# Altium PCB Arm_controller.PcbDoc
Units mm, origin at the board's own origin, x right, y up, seen from the top; angles counter-clockwise.
Board outline 56.8 x 61.9 mm, 2 copper layers (Top Layer, Bottom Layer); 70 components, 63 nets, 278 pads, 278 vias.
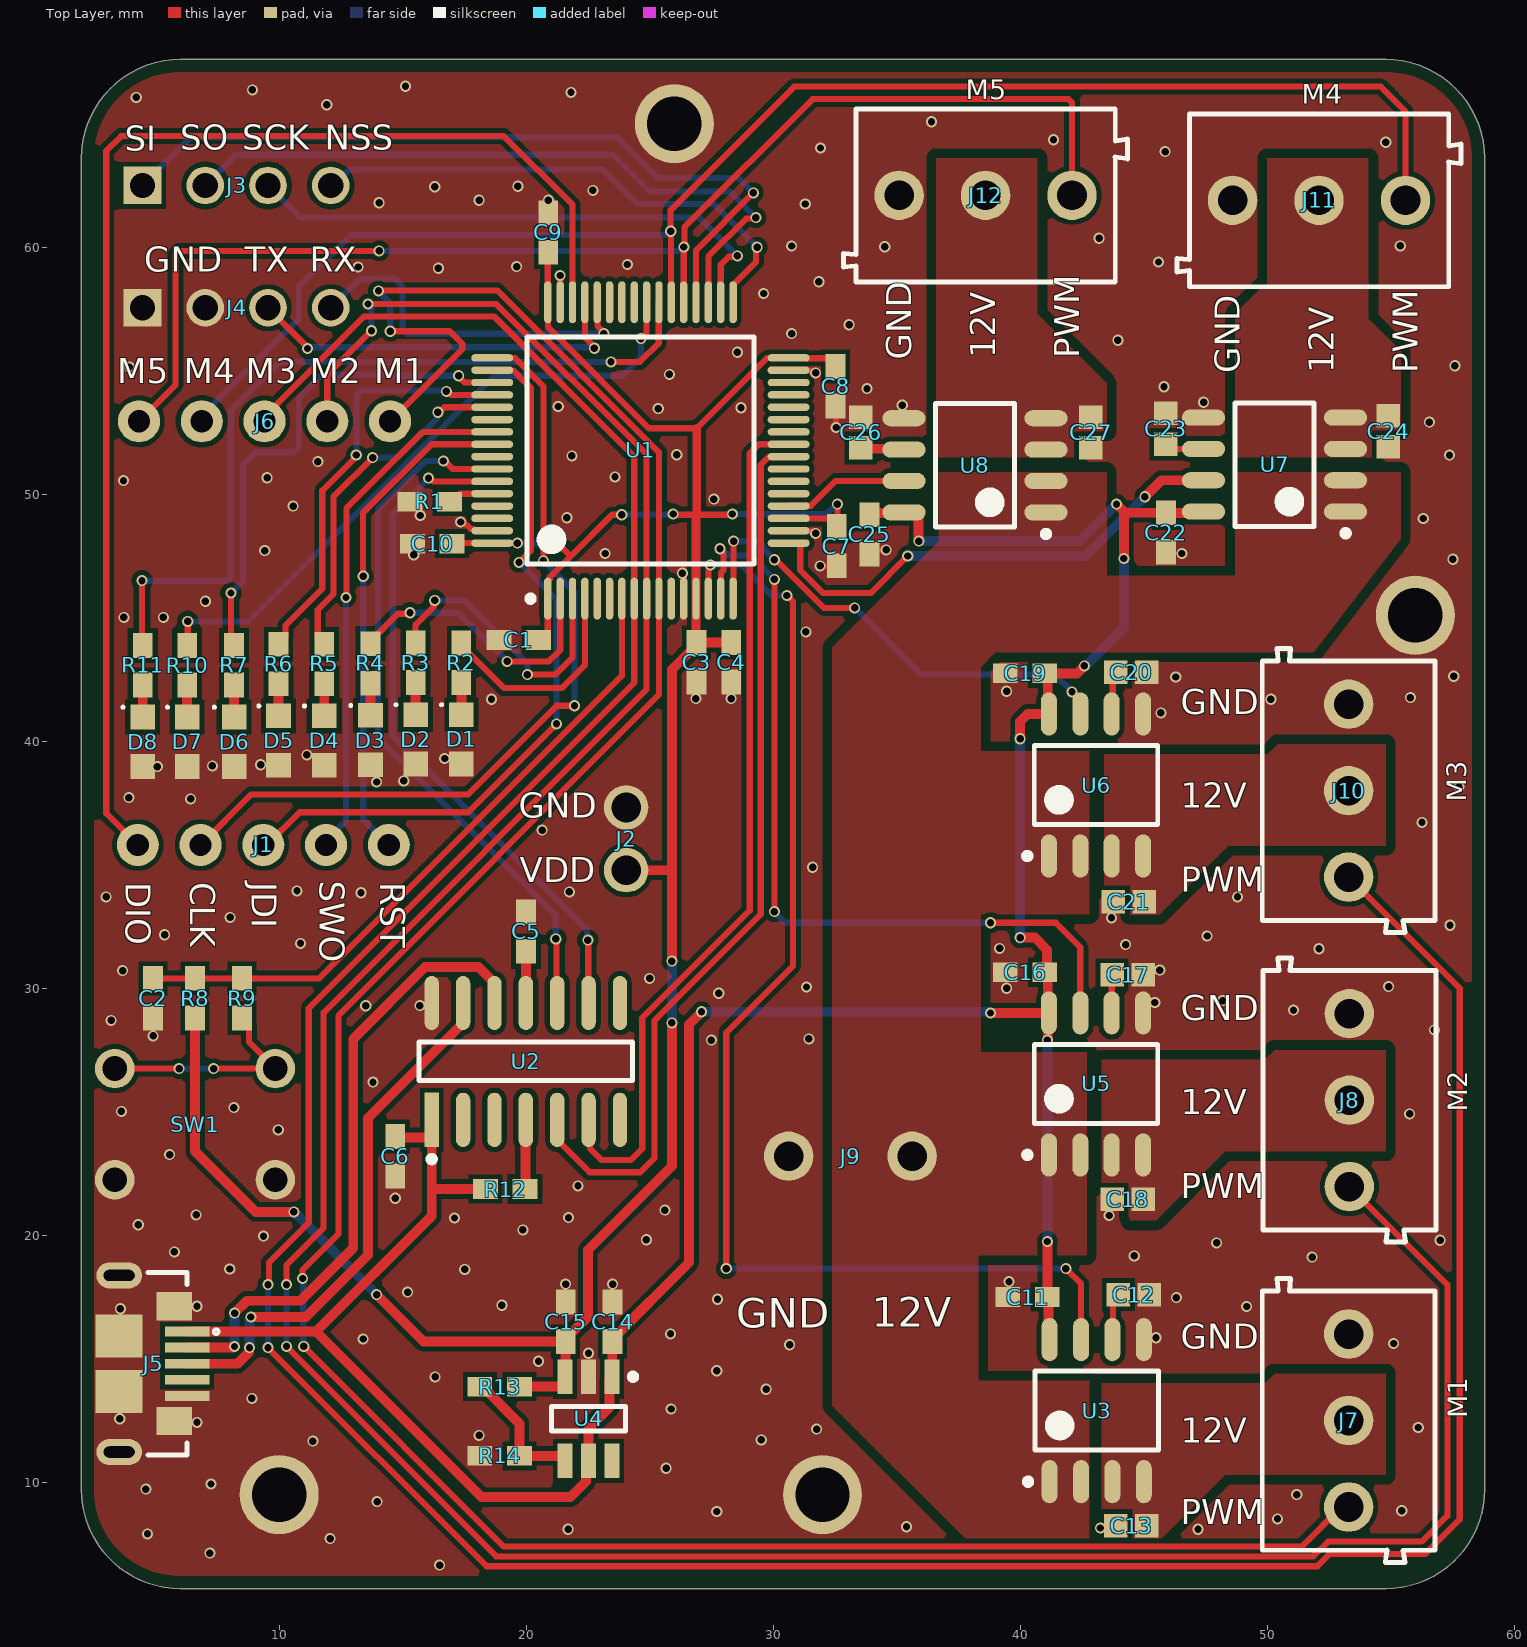
[diagram p0: Top Layer view]
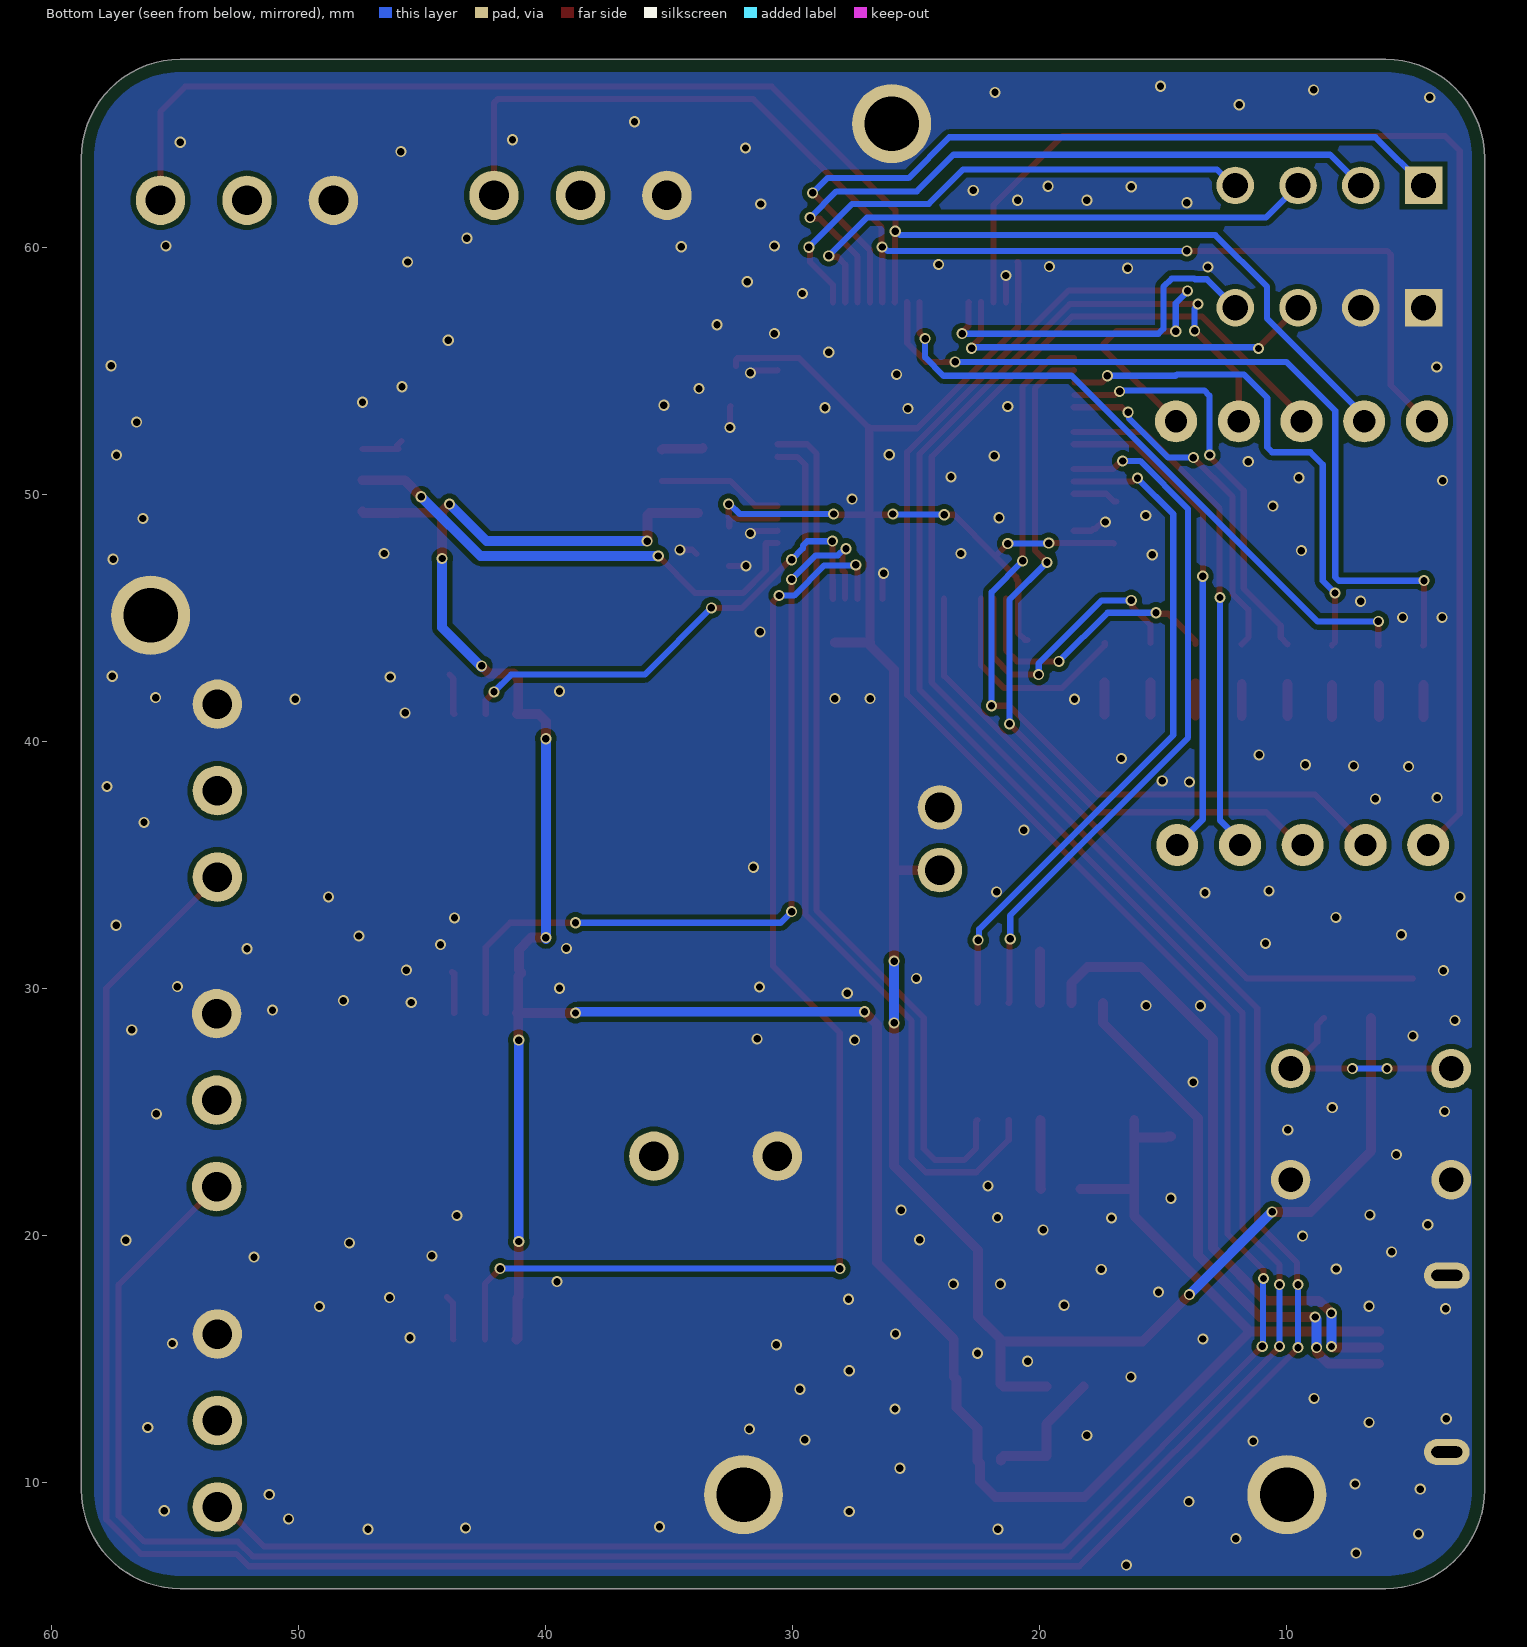
[diagram p1: Bottom Layer view, seen from below]
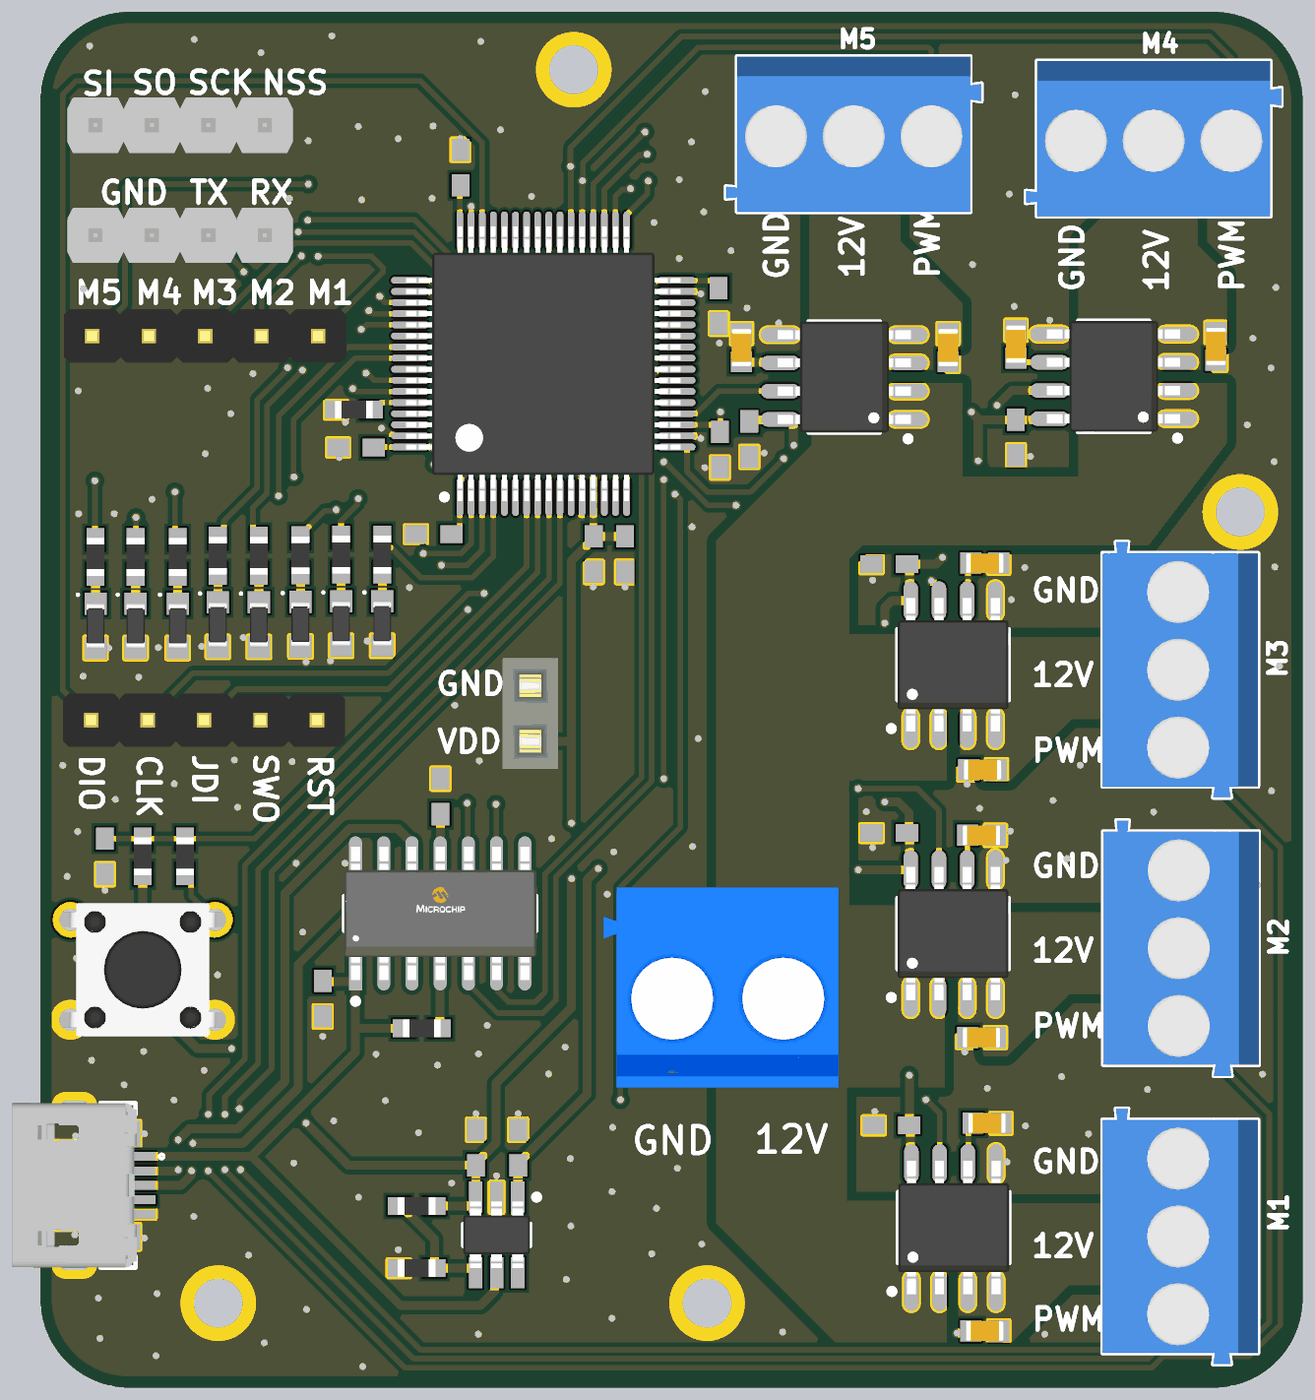
[diagram p2: 3D render of the assembled board from above, using the file's embedded part models]

## Layer stack, top to bottom
Top Solder: solder mask 0.0102, Solder Resist, Dk 3.5
Top Layer: signal copper 0.0356
Dielectric 1: dielectric 0.32, FR-4, Dk 4.8
Bottom Layer: signal copper 0.0356
Bottom Solder: solder mask 0.0102, Solder Resist, Dk 3.5

## Board outline
6,5.7 cw(c6,9.7) 2,9.7 2,63.6 cw(c6,63.6) 6,67.6 54.8,67.6 cw(c54.8,63.6) 58.8,63.6 58.8,9.7 cw(c54.8,9.7) 54.8,5.7

## Design rules (kind name [scope] priority, off if disabled: settings)
BoardOutlineClearance [All] p1: gap=0.254 ignorepadtopadclearanceinfootprint=FALSE except(0: Arc-SplitContinuation Track-SplitContinuation SMDPad-SplitContinuation THPad-SplitContinuation Via-SplitContinuation Fill-SplitContinuation Poly-SplitContinuation Region-SplitContinuation Text-SplitContinuation; 0.5: Arc-OutlineEdge Track-OutlineEdge SMDPad-OutlineEdge THPad-OutlineEdge Via-OutlineEdge Fill-OutlineEdge Poly-OutlineEdge Region-OutlineEdge Text-OutlineEdge)
Clearance [All] p1: gap=0.254 ignorepadtopadclearanceinfootprint=FALSE except(0.15: Arc-Track Arc-SMDPad Arc-THPad Arc-Via Arc-Hole Track-Track Track-SMDPad Track-THPad Track-Via Track-Hole SMDPad-SMDPad SMDPad-Via SMDPad-Hole THPad-Via THPad-Hole Via-Via Via-Hole Fill-Hole Poly-Hole Region-Hole Text-Hole; 0.2: Arc-Arc Arc-Poly Track-Poly SMDPad-THPad SMDPad-Poly THPad-THPad THPad-Poly Via-Poly Fill-Poly; 0.4: Poly-Poly)
MinimumSolderMaskSliver [All] p1: minsoldermaskwidth=0.2
PlaneClearance [All] p1: clearance=0.6
PlaneConnect [All] p1: planeconnectstyle=Direct reliefexpansion=0.508 reliefentries=4 reliefconductorwidth=0.254 reliefairgap=0.254
PolygonConnect [All] p1: connectstyle=Direct reliefconductorwidth=0.254 reliefentries=4 polygonreliefangle="90 Angle" airgapwidth=0.254
RoutingVias [All] p1: holewidth=0.2 width=0.6 viastyle="Through Hole" minholewidth=0.15 minwidth=0.3 maxholewidth=1 maxwidth=2
SilkToSilkClearance [All] p1: silktosilkclearance=0.2
SilkToSolderMaskClearance [IsPad] p1: minsilkscreentomaskgap=0.1 clearancetoexposedcopper=TRUE
SolderMaskExpansion [All] p1: expansion=0.102 istentingtop=FALSE
SupplyNets "Schematic Supply Nets_3" [InNet('12V')] p1: voltage=0.000
SupplyNets "Schematic Supply Nets_2" [InNet('VDD_CAP_filter_1')] p2: voltage=0.000
SupplyNets "Schematic Supply Nets_1" [InNet('VUSB (5V)')] p3: voltage=0.000
SupplyNets "Schematic Supply Nets" [InNet('GND')] p4: voltage=0.000
Width [All] p1: maxlimit=5 minlimit=0.2 preferedwidth=0.4
25 further rules are at their usual default settings.

## Classes and differential pairs
component class Signal_and_supply: C1 C4 C5 C12 C19 C22 C23 C24 C25 C26 C27 J9 J10 J11 J12 R9 R12 U3 U4 U5 U6 U7 U8
component class MCU: C1 C5 C19 C22 C25 D1 D2 D4 D5 D6 D7 D8 J1 J2 J10 J12 R2 R5 R8 R12 R13 SW1 U1 U2

## Components (designator, comment, footprint, x,y, rotation, side; value= is the part's Value field where it differs from the comment)
C1 "Capacitor 0603 generic" CAPC1608X08N 19.7,44.1 r180 top
C2 "Capacitor 0603 generic" CAPC1608X08N 4.9,29.6 r90 top
C3 "Capacitor 0603 generic" CAPC1608X08N 26.9,43.2 r270 top
C4 "Capacitor 0603 generic" CAPC1608X08N 28.304,43.198 r270 top
C5 "Capacitor 0603 generic" CAPC1608X08N 20,32.3 r90 top
C6 "Capacitor 0603 generic" CAPC1608X08N 14.7,23.2 r270 top
C7 "Capacitor 0603 generic" CAPC1608X08N 32.575,47.9 r270 top
C8 "Capacitor 0603 generic" CAPC1608X08N 32.525,54.375 r270 top
C9 "Capacitor 0603 generic" CAPC1608X08N 20.9,60.6 r90 top
C10 "Capacitor 0603 generic" CAPC1608X08N 16.2,48 r180 top
C11 "Capacitor 0603 generic" CAPC1608X08N 40.3,17.5 r180 top
C12 "Capacitor 100 nF +/-10% 50 V 0603" CAPC1608X90X40NL10T20 44.6,17.6 r180 top value=100nF
C13 "Capacitor 100 nF +/-10% 50 V 0603" CAPC1608X90X40NL10T20 44.5,8.25 r0 top value=100nF
C14 "Capacitor 0603 generic" CAPC1608X08N 23.5,16.5 r270 top
C15 "Capacitor 0603 generic" CAPC1608X08N 21.6,16.5 r90 top
C16 "Capacitor 0603 generic" CAPC1608X08N 40.2,30.65 r180 top
C17 "Capacitor 100 nF +/-10% 50 V 0603" CAPC1608X90X40NL10T20 44.35,30.55 r180 top value=100nF
C18 "Capacitor 100 nF +/-10% 50 V 0603" CAPC1608X90X40NL10T20 44.35,21.45 r0 top value=100nF
C19 "Capacitor 0603 generic" CAPC1608X08N 40.2,42.75 r180 top
C20 "Capacitor 100 nF +/-10% 50 V 0603" CAPC1608X90X40NL10T20 44.5,42.8 r180 top value=100nF
C21 "Capacitor 100 nF +/-10% 50 V 0603" CAPC1608X90X40NL10T20 44.4,33.5 r0 top value=100nF
C22 "Capacitor 0603 generic" CAPC1608X08N 45.9,48.45 r270 top
C23 "Capacitor 100 nF +/-10% 50 V 0603" CAPC1608X90X40NL10T20 45.9,52.65 r270 top value=100nF
C24 "Capacitor 100 nF +/-10% 50 V 0603" CAPC1608X90X40NL10T20 54.9,52.55 r90 top value=100nF
C25 "Capacitor 0603 generic" CAPC1608X08N 33.9,48.375 r270 top
C26 "Capacitor 100 nF +/-10% 50 V 0603" CAPC1608X90X40NL10T20 33.55,52.5 r270 top value=100nF
C27 "Capacitor 100 nF +/-10% 50 V 0603" CAPC1608X90X40NL10T20 42.85,52.5 r90 top value=100nF
D1 "KP-1608ZGC" DIOM1608X11N 17.378,40.078 r90 top
D2 "KP-1608ZGC" DIOM1608X11N 15.528,40.078 r90 top
D3 "KP-1608ZGC" DIOM1608X11N 13.7,40.05 r90 top
D4 "KP-1608ZGC" DIOM1608X11N 11.828,40.028 r90 top
D5 "KP-1608ZGC" DIOM1608X11N 9.978,40.028 r90 top
D6 "KP-1608ZGC" DIOM1608X11N 8.178,39.978 r90 top
D7 "KP-1608ZGC" DIOM1608X11N 6.278,39.978 r90 top
D8 "KP-1608ZGC" DIOM1608X11N 4.478,39.978 r90 top
J1 "Header-2.54-ZL201-05G" Header-2.54-ZL201-05G-Footprint-1 9.36,35.8 r0 top
J2 "2_pin_f_2_54" 2_pin_f_2_54-Footprint-1 24.05,36.05 r180 top
J3 "MTLW-104-07-F-S-125" SMTC-MTLW-104-07-X-S-125 4.47,62.5 r0 top
J4 "MTLW-104-07-F-S-125" SMTC-MTLW-104-07-X-S-125 4.47,57.55 r0 top
J5 "USB3076" USB3076-XX-X_revC 3.5,14.8 r270 top
J6 "Header-2.54-ZL201-05G" Header-2.54-ZL201-05G-Footprint-1 9.41,52.95 r180 top
J7 "691103110003" 691103110003 53.3,12.5 r90 top
J8 "691103110003" 691103110003 53.328,25.472 r90 top
J9 "5mmScrewTerminal" 5mmScrewTerminal-Footprint-1 33.128,23.2 r0 top
J10 "691103110003" 691103110003 53.3,38 r90 top
J11 "691103110003" 691103110003 52.1,61.9 r180 top
J12 "691103110003" 691103110003 38.6,62.1 r180 top
R1 "Resistor 0603 generic" RESC1608X04N 16.1,49.7 r0 top
R2 "Resistor 0603 generic" RESC1608X04N 17.378,43.178 r270 top
R3 "Resistor 0603 generic" RESC1608X04N 15.528,43.178 r270 top
R4 "Resistor 0603 generic" RESC1608X04N 13.7,43.15 r270 top
R5 "Resistor 0603 generic" RESC1608X04N 11.828,43.128 r270 top
R6 "Resistor 0603 generic" RESC1608X04N 9.978,43.128 r270 top
R7 "Resistor 0603 generic" RESC1608X04N 8.178,43.078 r270 top
R8 "Resistor 0603 generic" RESC1608X04N 6.6,29.6 r90 top
R9 "Resistor 0603 generic" RESC1608X04N 8.5,29.6 r270 top
R10 "Resistor 0603 generic" RESC1608X04N 6.278,43.078 r270 top
R11 "Resistor 0603 generic" RESC1608X04N 4.478,43.078 r270 top
R12 "Resistor 0603 generic" RESC1608X04N 19.158,21.872 r180 top
R13 "Resistor 0603 generic" RESC1608X04N 18.928,13.872 r180 top
R14 "Resistor 0603 generic" RESC1608X04N 18.928,11.072 r180 top
SW1 "NRST" "Button 6mm tht-Footprint-1" 6.6,24.5 r0 top
U1 "STM32F303RDT7" LQFP50P1235X1235X165-64N 24.628,51.772 r90 top
U2 "mcp2221_usb_uart" FP-C04-065-SL-IPC_B 19.988,27.038 r90 top
U3 "ACS712" SOIC127P600X175-8N 43.1,12.9 r90 top
U4 "MAX8880EUT+T" SOT95P280X145-6N 22.528,12.572 r270 top
U5 "ACS712" SOIC127P600X175-8N 43.072,26.128 r90 top
U6 "ACS712" SOIC127P600X175-8N 43.072,38.228 r90 top
U7 "ACS712" SOIC127P600X175-8N 50.3,51.2 r180 top
U8 "ACS712" SOIC127P600X175-8N 38.172,51.172 r180 top

## Footprints (in the part's own frame and the unit in brackets; to place one, negate y for a bottom-side part, rotate by r counter-clockwise, add the part's x,y. Pads: shape width x height; smd on the part's side, far side on the other; paste and mask are expansions set on the pad)
2_pin_f_2_54-Footprint-1 [mm]
  round 1.8 hole 1.2: 1(0,1.27) 2(0,-1.27)
  body extent -1.25,-2.48 1.25,2.52, height 9
5mmScrewTerminal-Footprint-1 [mm]
  round 2 hole 1.2: 1(-2.5,0) 2(2.5,0)
  body extent -5.8,-4 4.8,5, height 12.6
691103110003 [mm] "3,50mm - modular - blue - Horizontal wire entry - Pressure clamp - 8,4mm height - 03p"
  round 2 hole 1.2: 1(-3.5,0) 2(0,0) 3(3.5,0)
  silkscreen extent -5.75,-3.5 5.75,3.5, body extent -5.75,-3.5 5.75,3.5, height 8.45
"Button 6mm tht-Footprint-1" [mm]
  round 1.6 hole 1: 1(-3.25,2.25) 1(3.25,2.25) 2(-3.25,-2.25) 2(3.25,-2.25)
  body extent -3.95,-3 3.95,3, height 5
CAPC1608X08N [mm] "Chip Capacitor, 2-Leads, Body 1,60x0,75mm, IPC Medium Density"
  rect 1x0.8 smd: 1(-0.8,0) 2(0.8,0)
  body extent -0.85,-0.4 0.85,0.4, height 0.8
CAPC1608X90X40NL10T20 [mm] "Chip Capacitor, 2-Leads, Body 1.70x0.90mm, IPC Medium Density"
  rect 0.95x0.95 smd: 1(-0.625,0) 2(0.625,0)
  body extent -0.85,-0.45 0.85,0.45, height 0.9
DIOM1608X11N [mm] "Molded Diode, 2-Leads, Body 1,60x0,80mm, IPC Medium Density"
  rect 1x1 smd: 1(-1,0) 2(1,0)
  silkscreen extent 1.35,0.75 1.45,0.85, body extent -1.02,-0.4 1.02,0.4, height 1.1
FP-C04-065-SL-IPC_B [mm]
  rect 2.2x0.582 smd paste+0 mask+0: 1(-2.366,3.81)
  rrect100% 2.2x0.582 smd paste+0 mask+0: 2(-2.366,2.54) 3(-2.366,1.27) 4(-2.366,0) 5(-2.366,-1.27) 6(-2.366,-2.54) 7(-2.366,-3.81) 8(2.366,-3.81) 9(2.366,-2.54) 10(2.366,-1.27) 11(2.366,0) 12(2.366,1.27) 13(2.366,2.54) 14(2.366,3.81)
  silkscreen extent -4.08,-4.33 0.78,4.33, body extent -3.7,-4.57 3.7,4.57, height 0.25
Header-2.54-ZL201-05G-Footprint-1 [mm]
  round 1.7 hole 0.9: 1(-5.08,0) 2(-2.54,0) 3(0,0) 4(2.54,0) 5(5.08,0)
  body extent -6.35,-1.27 6.35,1.13, height 8.56
LQFP50P1235X1235X165-64N [mm] "SQFP, 64-Leads, Body 10,00x10,00mm, Pitch 0,50mm, IPC Medium Density"
  oval 1.7x0.3 smd: 1(-6,3.75) 2(-6,3.25) 3(-6,2.75) 4(-6,2.25) 5(-6,1.75) 6(-6,1.25) 7(-6,0.75) 8(-6,0.25) 9(-6,-0.25) 10(-6,-0.75) 11(-6,-1.25) 12(-6,-1.75) 13(-6,-2.25) 14(-6,-2.75) 15(-6,-3.25) 16(-6,-3.75) 33(6,-3.75) 34(6,-3.25) 35(6,-2.75) 36(6,-2.25) 37(6,-1.75) 38(6,-1.25) 39(6,-0.75) 40(6,-0.25) 41(6,0.25) 42(6,0.75) 43(6,1.25) 44(6,1.75) 45(6,2.25) 46(6,2.75) 47(6,3.25) 48(6,3.75)
  oval 0.3x1.7 smd: 17(-3.75,-6) 18(-3.25,-6) 19(-2.75,-6) 20(-2.25,-6) 21(-1.75,-6) 22(-1.25,-6) 23(-0.75,-6) 24(-0.25,-6) 25(0.25,-6) 26(0.75,-6) 27(1.25,-6) 28(1.75,-6) 29(2.25,-6) 30(2.75,-6) 31(3.25,-6) 32(3.75,-6) 49(3.75,6) 50(3.25,6) 51(2.75,6) 52(2.25,6) 53(1.75,6) 54(1.25,6) 55(0.75,6) 56(0.25,6) 57(-0.25,6) 58(-0.75,6) 59(-1.25,6) 60(-1.75,6) 61(-2.25,6) 62(-2.75,6) 63(-3.25,6) 64(-3.75,6)
  silkscreen extent -6.12,-4.6 4.6,4.6, body extent -6.17,-6.17 6.17,6.17, height 1.65
RESC1608X04N [mm] "Chip Resistor, 2-Leads, Body 1,60x0,75mm, IPC Medium Density"
  rect 1x0.8 smd: 1(-0.8,0) 2(0.8,0)
  body extent -0.85,-0.4 0.85,0.4, height 0.4
SMTC-MTLW-104-07-X-S-125 [mm] "Terminal Assembly, 1x4 Pins, Vertical, 2.54mm Pitch, Male"
  rect 1.52x1.52 hole 1.02: 1(0,0)
  round 1.52 hole 1.02: 2(2.54,0) 3(5.08,0) 4(7.62,0)
  body extent -1.27,-1.24 8.89,1.24, height 4.7
SOIC127P600X175-8N [mm] "SOIC, 8-Leads, Body 4,90x3,90mm, Pitch 1,27mm, IPC Medium Density"
  oval 1.75x0.65 smd: 1(-2.875,1.905) 2(-2.875,0.635) 3(-2.875,-0.635) 4(-2.875,-1.905) 5(2.875,-1.905) 6(2.875,-0.635) 7(2.875,0.635) 8(2.875,1.905)
  silkscreen extent -3,-2.5 1.6,2.9, body extent -3,-2.5 3,2.5, height 1.75
SOT95P280X145-6N [mm] "SOT23, 6-Leads, Body 2,90x2,80mm, Pitch 0,95mm, IPC Medium Density"
  rect 1.4x0.6 smd: 1(-1.7,0.95) 2(-1.7,0) 3(-1.7,-0.95) 4(1.7,-0.95) 5(1.7,0) 6(1.7,0.95)
  silkscreen extent -1.82,-1.5 0.5,1.93, body extent -1.5,-1.5 1.5,1.5, height 1.45
USB3076-XX-X_revC [mm] "Micro USB Receptacle, Type B, SMT, Horizontal, Bottom Mount, without Peg, with Outer Shell Stakes, without Mating Face Lead-In"
  rect 0.4x1.8 smd: 1(-1.3,2.775) 2(-0.65,2.775) 3(0,2.775) 4(0.65,2.775) 5(1.3,2.775)
  oval 1.05x1.85 hole 0.45 slot 1.25 at 90 deg: S(-3.575,0.025) S(3.575,0.025)
  rect 1.15x1.45 smd: S(-2.32,2.255) S(2.32,2.255)
  rect 1.75x1.9 smd: S(-1.125,0.025) S(1.125,0.025)
  silkscreen extent -3.7,1.2 3.7,4.05, body extent -3.7,-2.77 3.7,2.83, height 2.69

## Part data
C1 C6 C15: library part CMP-001-00083-2, "Generic 0603 capacitor. No set voltage/capacitance rating.", Capacitance="4.7 uF"
C2 C4 C5 C14: library part CMP-001-00083-2, "Generic 0603 capacitor. No set voltage/capacitance rating.", Capacitance="1 uF"
C3: library part CMP-001-00083-2, "Generic 0603 capacitor. No set voltage/capacitance rating.", Capacitance="10 nF"
C7 C8 C9 C10: library part CMP-001-00083-2, "Generic 0603 capacitor. No set voltage/capacitance rating.", Capacitance="100 nF"
C11 C16 C19 C22 C25: library part CMP-001-00083-2, "Generic 0603 capacitor. No set voltage/capacitance rating.", Capacitance="0.1 uF"
C12 C13 C17 C18 C20 C21 C23 C24 C26 C27: library part CMP-001-00017-6, "Chip Capacitor, 100 nF, +/- 10%, 50 V, 0603 (1608 Metric)", Capacitor Type=Ceramic, Case/Package=0603, Max Operating Temperature=125°C, Min Operating Temperature=-55°C, Tolerance=10%, Voltage Rating=50V, Mounting Technology=SM, Pins=2, RoHS Compliant=True
D1 D2 D3 D4 D5 D6 D7 D8: library part CMP-007-00036-1, "Single Color LED, Green, Water Clear, 1.2mm", Forward Current=25mA, Max Operating Temperature=85°C, Min Operating Temperature=-40°C, Mounting Technology="Surface Mount", Pins=2, RoHS Compliant=Yes
J1 J6: library part CMP-00028-00007-3, "Male header, pitch 2.54 mm, 1x5 pins"
J2: library part CMP-00028-00011-1, "2 pin female header, 2.54 mm pitch."
J3 J4: library part CMP-1024-00073-1, "Low Profile .025\" SQ Post Header, Through-hole, Vertical, -55 to 125 degC, 2.54 mm Pitch, 4-Pin, Male, RoHS", Manufacturer=Samtec, Temperature Range="-55 to 125 degC", ComponentLink1Description="Manufacturer URL", ComponentLink1URL=http://www.samtec.com, ComponentLink2Description=Datasheet, ComponentLink2URL=http://www.samtec.com/documents/webfiles/pdf/MTLW_TH.PDF, ComponentLink3Description="Package Specification", ComponentLink3URL=http://www.samtec.com/documents/webfiles/cpdf/MTLW-1XX-XX-XX-X-XXX-XX-XX-MKT1.pdf, DatasheetVersion=F-214, Mounting Technology=Through-hole, Orientation=Vertical, PackageDescription="Low Profile Terminal Assembly", PackageReference=MTLW-104-07-X-S-125, PackageVersion="T, 6/1991", PartNumber=MTLW-104-07-F-S-125, Pitch="2.54 mm", RoHS=True
J5: library part CMP-003-000000-4, "Micro USB Receptacle, Type B, SMT, Horizontal, Bottom Mount, without Peg, with Outer Shell Stakes, without Mating Face Lead-In", Component Type=Standard, Design Item ID=USB3076-XX-X_revC, Pin Count=6, Source=USB3076-XX-X_revC.SchLib
J7 J8 J10 J11 J12: library part CMP-00028-00008-2, "Barrier Strip Terminal Block", RoHS Compliant=Yes
J9: library part CMP-00028-00010-3, "16A 5 mm pitch screw terminal, 2 sockets."
R1 R2 R3 R4 R5 R6 R7 R8 R10 R11 R12: library part CMP-009-00177-2, "Generic 0603 resistor, no fixed value.", Resistance=10k
R9: library part CMP-009-00177-2, "Generic 0603 resistor, no fixed value.", Resistance=100
R13: library part CMP-009-00177-2, "Generic 0603 resistor, no fixed value.", Resistance=160k
R14: library part CMP-009-00177-2, "Generic 0603 resistor, no fixed value.", Resistance=100k
SW1: library part CMP-00028-00009-2, "Button 6mm tht", Pins=2
U1: library part CMP-020-00023-3, "ARM Microcontroller, 32-Bit, FLASH, CORTEX-M4F CPU, 72MHz, CMOS, LQFP64", Case/Package=LQFP, Max Operating Temperature=105°C, Min Operating Temperature=-40°C, Interface=I2C,SPI,USB,CAN,I2S,IrDA,UART,USART,LIN, Pins=64, RoHS Compliant=Yes
U2: library part CMP-015-00009-2, "Usb uart converter.", Case/Package=SOP, Max Operating Temperature=85°C, Max Supply Voltage=5.5V, Min Operating Temperature=-40°C, Min Supply Voltage=3V, Nominal Supply Voltage=3.3V, Pins=14, RoHS Compliant=Yes
U3 U5 U6 U7 U8: library part CMP-010-00024-2, "Integrated, Hall-Effect-Based Linear Current Sensor IC", Case/Package=SOIC8, Max Operating Temperature=85°C, Max Supply Voltage=8V, Min Operating Temperature=-40°C, Min Supply Voltage=4.5V, Nominal Supply Current=10mA, Nominal Supply Voltage=5V, Output Current=3mA, ComponentLink1Description=Datasheet, ComponentLink1URL=https://www.farnell.com/datasheets/3283075.pdf?_gl=1*655fm5*_gcl_aw*R0NMLjE3MjkyNjA3NzYuQ2p3S0NBandqc2k0QmhCNUVpd0FGQUwwWUJJQ1IwTktsZUpReWIxcFRubGxNLVh3bUhQcFctSFhLUnYtVFFUc01qMmhGYkt5YWJZdmpob0N3c0lRQXZEX0J3RQ..*_gcl_au*MTA1Mjg3ODU0LjE3Mjc3MDI1ODg., Mounting Technology=smd, Pins=8, RoHS Compliant=yes, Sensor Type="analog current sensor"
U4: library part CMP-019-00049-1, "Ultra-Low-IQ, Low-Dropout Linear Regulator, output 1.25 - 5.5 V.", Case/Package=SOT-6, Dropout Voltage=100mV, Max Operating Temperature=125°C, Max Supply Voltage=12V, Min Operating Temperature=-40°C, Min Supply Voltage=2.5V, Nominal Supply Current=3mA, Output Current=200mA, Output Voltage=3.3V, Mounting Technology=smd, Pins=6, RoHS Compliant=yes

## Free pads (board coordinates)
  round 3.2 hole 2.2: 0(10,9.5) 0(26,65) 0(32,9.5) 0(56,45.1)

## Via types
v1: diameter 0.45, hole 0.3, Top Layer to Bottom Layer, tented both sides, 278 vias

## Nets (pads, with @x,y where several pads share a name; then routed paths per layer and width w, separated by ;. In a path a pad name is that pad's centre, name@x,y a point inside that pad or via, vN(x,y) a via of type N, cw(c..) or ccw(c..) an arc to the next point about the centre after c; other vN are vias at no path point)
12V: J9.2 U3.1 U3.2 U5.1 U5.2 U6.1 U6.2 U7.1 U7.2 U8.1 U8.2
CAN_RX: J4.4 U1.44 | length 14.9
  Top Layer w0.25: U1.44 22.888,57.762 22.888,56.816 23.15,56.554 v1(23.15,56.5)
  Bottom Layer w0.25: J4.4 13.24,58.7 13.72,58.7 13.751,58.731 14.672,58.731 15,58.404 15,56.7 15.2,56.5 v1(23.15,56.5)
CAN_TX: J4.3 U1.45 | length 16
  Top Layer w0.25: J4.3 11.15,55.95 v1(11.15,55.9) ; U1.45 22.378,56.346 22.762,55.963 v1(22.762,55.909)
  Bottom Layer w0.25: v1(11.15,55.9) 11.188,55.938 11.33,55.938 11.344,55.953 22.664,55.953 22.708,55.909 v1(22.762,55.909)
GND: C1.2 C2.1 C3.2 C4.2 C5.2 C6.2 C7.2 C8.2 C9.2 C10.2 C11.2 C12.1 C13.1 C14.1 C15.2 C16.2 C17.1 C18.1 C19.2 C20.1 C21.1 C22.2 C23.1 C24.1 C25.2 C26.1 C27.1 D1.1 D2.1 D3.1 D4.1 D5.1 D6.1 D7.1 D8.1 J2.2 J4.1 J4.2 J5.5 J5.S J7.3 J8.3 J9.1 J10.3 J11.3 J12.3 pad.0 R1.1 R14.2 SW1.2 U1.12 U1.18 U1.31 U1.47 U1.63 U2.14 U3.5 U4.2 U5.5 U6.5 U7.5 U8.5 | length 8.1
  Top Layer w0.25: v1(17.35,48.875) 17.36,48.865 17.484,48.865 17.752,48.597 17.84,48.597 17.915,48.522 U1.63 ; U1.47 v1(21.378,58.854) ; v1(26.325,46.8) 26.325,46.786 26.369,46.743 26.369,45.781 U1.12 ; U1.18 30.638,48.512 31.567,48.512 31.666,48.413 v1(31.72,48.413) ; U1.31 30.638,55.012 31.567,55.012 31.666,54.913 v1(31.72,54.913) ; v1(31.9,47.1) C7.2 ; C8.2 32.55,53.55 v1(32.55,52.7) ; C25.2 34.075,47.75 v1(34.575,47.75)
  other v1: 16.5,6.65 7.196,7.132 12.067,7.717 4.673,7.912 21.7,8.1 47.2,8.1 43.25,8.15 35.4,8.2 50.417,8.517 27.717,8.817 55.45,8.85 13.967,9.217 51.2,9.5 4.604,9.724 7.242,9.931 25.667,10.567 11.367,11.667 29.517,11.717 18.1,11.9 31.763,12.156 56.117,12.217 6.675,12.425 3.55,12.575 25.867,12.967 8.9,13.4 29.717,13.767 16.317,14.267 27.717,14.517 20.5,14.9 22.525,15.225 30.667,15.567 55.117,15.617 13.4,15.8 45.5,15.85 25.845,16.009 3.575,17.025 6.675,17.125 49.167,17.117 19.017,17.167 27.749,17.409 46.325,17.475 15.2,17.7 21.6,18.025 23.5,18.025 39.55,18.125 17.517,18.617 8.003,18.636 51.817,19.117 44.617,19.167 5.762,19.326 47.953,19.692 24.867,19.817 57,19.8 9.367,19.967 19.867,20.217 4.297,20.429 17.1,20.7 21.717,20.717 43.6,20.8 6.641,20.825 25.617,21.017 14.7,21.5 22.1,22 5.567,23.267 9.967,24.267 55.767,24.917 3.617,25.017 8.167,25.167 13.8,26.2 27.5,27.9 31.45,27.95 4.9,28.075 56.767,28.317 3.2,28.7 51.067,29.117 13.506,29.294 15.7,29.3 45.45,29.425 48.2,29.5 27.8,29.8 39.45,30 31.35,30.05 54.917,30.067 25,30.4 3.667,30.717 45.65,30.735 52.1,31.6 39.167,31.617 44.267,31.767 10.867,31.817 47.567,32.117 5.367,32.167 57.4,32.55 43.7,32.85 8.017,32.867 3,33.7 48.8,33.7 13.317,33.867 21.75,33.9 10.726,33.94 31.6,34.9 20.65,36.4 56.267,36.717 6.417,37.667 3.917,37.717 57.767,38.167 13.95,38.35 15.046,38.396 5.075,38.975 7.3,39 9.25,39.05 16.7,39.3 11.125,39.45 45.7,41.15 18.6,41.7 50.152,41.7 26.875,41.725 28.3,41.725 55.799,41.769 39.45,42.025 46.3,42.6 57.555,42.63 31.325,44.425 3.717,45.017 5.317,45.017 7.017,45.667 57.517,47.367 15.45,47.55 23.2,47.6 46.55,47.6 9.417,47.717 56.317,49.017 21.65,49.05 15.717,49.14 10.567,49.517 27.6,49.8 3.7,50.55 9.517,50.667 23.6,50.7 11.567,51.317 21.85,51.55 26.1,51.6 57.383,51.583 56.567,52.917 25.347,53.464 28.7,53.5 21.3,53.55 35.225,53.6 47.425,53.725 33.8,54.275 45.825,54.35 25.8,54.85 3.935,55.15 57.6,55.2 28.55,55.75 43.954,56.231 30.75,56.5 33.073,56.861 29.615,58.125 31.85,58.6 16.45,59.15 13.2,59.2 19.617,59.217 24.1,59.3 45.6,59.4 34.519,60.019 30.75,60.05 55.386,60.054 43.196,60.364 31.3,61.75 14.05,61.8 18.1,61.9 20.9,61.9 22.7,62.3 16.3,62.45 19.667,62.467 45.867,63.867 31.917,64.017 54.8,64.25 41.35,64.35 36.413,65.081 11.93,65.77 4.217,66.067 21.817,66.267 8.917,66.367 15.117,66.517
I2C1_SCL: U1.58 U2.10 | length 28.6
  Top Layer w0.25: v1(16.65,51.346) 16.704,51.346 17.029,51.022 U1.58 ; v1(21.2,32) 21.229,31.971 21.229,29.433 U2.10
  Bottom Layer w0.25: v1(16.65,51.346) 15.946,51.346 14,49.4 14,40.15 21.2,32.95 v1(21.2,32)
I2C1_SDA: U1.59 U2.9 | length 27.8
  Top Layer w0.25: v1(16.05,50.65) 16.104,50.65 16.233,50.522 U1.59 ; v1(22.5,31.95) 22.514,31.936 22.514,29.418 U2.9
  Bottom Layer w0.25: v1(16.05,50.65) 14.6,49.2 14.6,40.25 22.462,32.388 22.462,31.988 v1(22.5,31.95)
JTDI: J1.3 U1.50 | length 30.2
  Top Layer w0.25: J1.3 9.509,35.8 10.837,37.128 17.655,37.128 v1(21.231,40.704) ; U1.50 18.638,55.012 19.488,55.012 19.7,54.8 19.7,54.783 20.2,54.283 20.2,47.73 v1(19.713,47.243)
  Bottom Layer w0.25: v1(19.713,47.243) 21.231,45.725 v1(21.231,40.704)
JTDO: J1.4 U1.55 | length 21.2
  Top Layer w0.25: v1(12.709,45.821) 12.727,45.839 12.727,49.427 15.822,52.522 U1.55
  Bottom Layer w0.25: J1.4 11.9,35.991 12.709,36.8 v1(12.709,45.821)
JTRST: J1.5 U1.56 | length 20.3
  Top Layer w0.25: v1(13.408,46.679) 13.396,46.691 13.396,49.246 16.172,52.022 U1.56
  Bottom Layer w0.25: v1(13.408,46.679) 13.408,36.832 J1.5
LED_DEBUG_1: R11.1 U1.39 | length 33.1
  Top Layer w0.25: v1(4.45,46.5) 4.45,43.907 R11.1 ; v1(23.435,55.359) 24.609,55.359 25.369,56.119 25.369,57.762 U1.39
  Bottom Layer w0.25: v1(4.45,46.5) 7.898,46.5 8.045,46.646 8.045,53.381 10.023,55.359 v1(23.435,55.359)
LED_DEBUG_2: R10.1 U1.40 | length 26.1
  Top Layer w0.25: R10.1 6.3,43.9 v1(6.3,44.85) ; v1(24.65,56.3) 24.65,56.318 24.878,56.547 U1.40
  Bottom Layer w0.25: v1(6.3,44.85) 8.766,44.85 18.716,54.8 23.907,54.8 24.65,55.543 v1(24.65,56.3)
LED_DEBUG_3: R7.1 U1.51 | length 20.5
  Top Layer w0.25: v1(8.052,46) 8.052,44.005 R7.1 ; v1(17.268,54.796) 17.268,54.76 17.507,54.522 U1.51@18.594,54.522
  Bottom Layer w0.25: v1(8.052,46) 8.55,46.498 8.55,51.2 9.05,51.7 10.6,51.7 10.8,51.9 10.8,53.9 11.75,54.85 14.455,54.85 14.509,54.796 v1(17.268,54.796)
LED_DEBUG_4: R6.1 U1.52 | length 16.9
  Top Layer w0.25: R6.1 10.253,44.203 10.253,44.681 11.75,46.177 11.75,50.15 13.1,51.5 v1@13.1,51.55 ; v1(16.774,54.162) 16.828,54.162 16.968,54.022 U1.52@18.593,54.022
  Bottom Layer w0.25: v1@13.136,51.599 13.136,53.99 13.346,54.2 16.736,54.2 v1(16.774,54.162)
  other v1: 13.124,51.587
LED_DEBUG_5: R5.1 U1.53 | length 14.4
  Top Layer w0.25: R5.1 11.562,44.195 11.562,45.32 12.2,45.959 12.2,49.897 v1(13.787,51.484) ; v1(16.43,53.32) 16.484,53.32 16.686,53.522 U1.53
  Bottom Layer w0.25: v1(13.787,51.484) 14.812,51.484 16.392,53.064 16.392,53.282 v1(16.43,53.32)
LED_DEBUG_6: R4.1 U1.2 | length 11.3
  Top Layer w0.25: R4.1 13.7,44.05 14.812,45.162 15.262,45.162 v1(15.3,45.2) ; v1(19.231,43.231) 20.919,43.231 21.378,43.69 U1.2
  Bottom Layer w0.25: v1(15.3,45.2) 17.261,45.2 v1(19.231,43.231)
LED_DEBUG_7: R3.1 U1.3 | length 11.8
  Top Layer w0.25: R3.1 15.528,44.721 16.262,45.455 16.262,45.662 v1(16.3,45.7) ; v1(20.05,42.7) 21.184,42.7 21.878,43.395 U1.3
  Bottom Layer w0.25: v1(16.3,45.7) 17.5,45.7 20.05,43.15 v1(20.05,42.7)
LED_DEBUG_8: R2.1 U1.4 | length 8.9
  Top Layer w0.25: R2.1 17.378,43.878 19.107,42.15 21.45,42.15 22.378,43.078 U1.4
MCU_NRST: C2.2 R8.2 R9.1 U1.7 | length 27.2
  Top Layer w0.25: C2.2 R8.2 R9.1 11.635,30.4 23.878,42.644 U1.7
Motor1_Power: C13.2 J7.2 U3.3 U3.4
Motor1_PWM: J6.1 J7.1 U1.10 | length 111.9
  Top Layer w0.25: v1(10.95,18.25) 10.95,18.6 12.4,20.05 12.4,28.895 25.378,41.874 U1.10 25.378,51.699 18.827,58.25 14.043,58.25 v1(14.024,58.231) ; v1(11,15.5) 19.1,7.4 51.4,7.4 53,9 J7.1 ; J6.1 17.416,55.876 17.416,56.084 16.9,56.6 v1(14.5,56.6)
  Bottom Layer w0.25: v1(10.95,18.25) 10.975,18.225 10.975,15.525 v1(11,15.5) ; v1(14.024,58.231) 14.024,58.211 14.5,57.735 v1(14.5,56.6)
Motor2_Power: C18.2 J8.2 U5.3 U5.4
Motor2_PWM: J6.2 J8.1 U1.9 | length 127.7
  Top Layer w0.25: v1(10.3,15.5) 10.3,15.493 18.793,7 51.866,7 52.466,7.6 56.254,7.6 57.3,8.646 57.3,18 J8.1 ; v1(10.3,18) 10.3,18.8 11.8,20.3 11.8,29.018 24.878,42.096 U1.9 24.878,51.622 18.8,57.7 v1(13.6,57.7) ; J6.2 11.95,54.828 v1(13.739,56.617)
  Bottom Layer w0.25: v1(10.3,15.5) v1(10.3,18) ; v1(13.6,57.7) 13.6,57.646 13.739,57.507 v1(13.739,56.617)
Motor3_Power: C21.2 J10.2 U6.3 U6.4
Motor3_PWM: J6.3 J10.1 U1.8 | length 142
  Top Layer w0.25: J6.3 9.41,53.16 13.45,57.2 18.7,57.2 24.378,51.522 U1.8 24.378,42.373 11.2,29.194 11.2,20.5 9.588,18.888 9.588,18.038 v1(9.55,18) ; v1(9.55,15.45) 18.4,6.6 52.031,6.6 52.531,7.1 56.401,7.1 57.8,8.499 57.8,30 J10.1
  Bottom Layer w0.25: v1(9.55,15.45) v1(9.55,18)
Motor4_Power: C24.2 J11.2 U7.3 U7.4
Motor4_PWM: J6.4 J11.1 U1.38 | length 62.2
  Top Layer w0.25: U1.38 25.869,57.781 25.869,60.633 v1(25.858,60.645) 25.85,60.652 25.85,61.5 30.85,66.5 54.6,66.5 55.6,65.5 J11.1@55.6,62.381
  Bottom Layer w0.25: J6.4 6.87,53.173 10.812,57.115 10.812,58.411 12.893,60.493 25.651,60.493 25.803,60.645 v1(25.858,60.645)
Motor5_Power: C27.2 J12.2 U8.3 U8.4
Motor5_PWM: J6.5 J12.1 U1.37 | length 52.8
  Top Layer w0.25: J6.5 5.8,54.42 5.8,59.704 5.946,59.85 v1(14.05,59.85) ; U1.37 26.383,57.776 26.383,60.003 26.407,60.028 26.407,60.805 31.603,66 41.954,66 42.1,65.854 J12.1
  Bottom Layer w0.25: v1(14.05,59.85) 26.175,59.85 26.333,60.008 v1(26.387,60.008)
NetC5_1: C5.1 U2.11 | length 2.1
  Top Layer w0.4: U2.11 19.994,29.409 C5.1@19.994,31.494
NetC12_2: C12.2 U3.6 | length 1.8
  Top Layer w0.25: U3.6 43.762,15.802 43.762,17.262 C12.2@44,17.5
NetC17_2: C17.2 U5.6 | length 1.7
  Top Layer w0.25: U5.6 C17.2@43.707,30.607 ; C17.2@43.707,30.557 C17.2@43.8,30.65
NetC20_2: C20.2 U6.6 | length 1.7
  Top Layer w0.25: U6.6 43.746,41.143 43.746,42.546 C20.2@43.9,42.7
NetC23_2: C23.2 U7.6 | length 1.7
  Top Layer w0.25: C23.2@45.85,52.15 C23.2@46.015,51.985 ; C23.2@45.965,51.835 U7.6
NetC26_2: C26.2 U8.6 | length 1.7
  Top Layer w0.4: C26.2@33.65,51.875 33.684,51.841 35.262,51.841 U8.6
NetD1_2: D1.2 R2.2 | length 1.3
  Top Layer w0.4: D1.2 R2.2
NetD2_2: D2.2 R3.2 | length 1.3
  Top Layer w0.4: D2.2 R3.2
NetD3_2: D3.2 R4.2 | length 1.3
  Top Layer w0.4: D3.2 R4.2
NetD4_2: D4.2 R5.2 | length 1.3
  Top Layer w0.4: D4.2 R5.2
NetD5_2: D5.2 R6.2 | length 1.3
  Top Layer w0.4: D5.2 R6.2
NetD6_2: D6.2 R7.2 | length 1.3
  Top Layer w0.4: D6.2 R7.2
NetD7_2: D7.2 R10.2 | length 1.3
  Top Layer w0.4: D7.2 R10.2
NetD8_2: D8.2 R11.2 | length 1.3
  Top Layer w0.4: D8.2 R11.2
NetJ5_2: J5.2 U2.12 | length 25.6
  Top Layer w0.4: J5.2 8.136,15.45 8.182,15.496 v1(8.196,15.496) ; v1(8.2,16.85) 8.7,17.35 10.863,17.35 13,19.487 13,27.941 15.913,30.854 18.077,30.854 18.718,30.213 U2.12
  Bottom Layer w0.4: v1(8.196,15.496) 8.198,15.498 8.198,16.848 v1(8.2,16.85)
NetJ5_3: J5.3 U2.13 | length 21.7
  Top Layer w0.4: J5.3 8.313,14.8 8.79,15.277 8.79,15.44 v1(8.8,15.45) ; v1(8.857,16.693) 11.093,16.693 13.6,19.2 13.6,24.746 17.448,28.595 U2.13
  Bottom Layer w0.4: v1(8.8,15.45) 8.8,16.623 8.857,16.68 v1(8.857,16.693)
NetR1_2: R1.2 U1.60 | length 1.9
  Top Layer w0.25: R1.2 17,49.7 17.322,50.022 U1.60
NetR9_2: R9.2 SW1.1 | length 9.1
  Top Layer w0.25: SW1.1@3.35,26.75 v1(5.95,26.75) ; v1(7.35,26.75) 9.85,26.75 8.775,27.825 8.775,28.525 R9.2
  Bottom Layer w0.25: v1(5.95,26.75) v1(7.35,26.75)
NetR12_1: R12.1 U2.4 | length 2.8
  Top Layer w0.4: R12.1 19.973,21.887 19.973,24.657 U2.4
NetR13_2: R13.2 R14.1 U4.4 | length 5.4
  Top Layer w0.4: R13.2@18.228,13.872 19.728,12.372 R14.1 21.478,11.072 21.578,10.972 U4.4
NetU1_14: U1.14 U3.7 | length 50.4
  Top Layer w0.25: U1.14 27.378,47.007 27.457,47.086 v1(27.457,47.14) ; v1(28.1,18.65) 28.1,28.2 30.8,30.9 30.8,45.658 v1(30.558,45.9) ; v1(41.85,18.65) 42.465,18.035 U3.7
  Bottom Layer w0.25: v1(27.457,47.14) 27.476,47.121 28.731,47.121 29.952,45.9 v1(30.558,45.9) ; v1(28.1,18.65) v1(41.85,18.65)
NetU1_15: U1.15 U5.7 | length 33.9
  Top Layer w0.25: v1(27.85,47.795) 27.85,47.74 27.986,47.604 27.986,46.921 27.888,46.822 U1.15@27.888,45.782 ; v1(30.05,33.1) v1(30.05,46.55) ; v1(38.8,32.65) 41.45,32.65 42.437,31.663 U5.7
  Bottom Layer w0.25: v1(27.85,47.795) 27.904,47.795 28.178,47.521 29.079,47.521 v1(30.05,46.55) ; v1(30.05,33.1) 30.5,32.65 v1(38.8,32.65)
NetU1_16: U1.16 U6.7 | length 19.7
  Top Layer w0.25: U1.16 28.388,45.781 28.388,46.517 28.4,46.528 v1(28.4,48.1) ; v1(30.05,47.35) 30.104,47.35 32.054,45.4 v1(33.3,45.4) ; v1(42.1,42) 42.1,41.995 42.437,41.658 U6.7
  Bottom Layer w0.25: v1(28.4,48.1) 29.418,48.1 29.596,47.921 29.596,47.804 v1(30.05,47.35) ; v1(33.3,45.4) 36,42.7 41.4,42.7 v1(42.1,42)
NetU1_17: U1.17 U7.7 | length 20.2
  Top Layer w0.25: U1.17 31.077,48.022 31.1,47.998 31.1,46.92 32.02,46 33.95,46 v1(35.45,47.5)
  Top Layer w0.4: v1(45.05,49.9) 45.715,50.565 U7.7
  Bottom Layer w0.4: v1(35.45,47.5) 42.65,47.5 v1(45.05,49.9)
NetU1_20: U1.20 U8.7 | length 5.1
  Top Layer w0.25: U1.20 30.638,49.531 31.531,49.531 32.537,50.537 U8.7
SPI2_MISO: J3.2 U1.35 | length 28.3
  Top Layer w0.25: U1.35 27.378,59.628 28.912,61.162 29.262,61.162 v1(29.3,61.2)
  Bottom Layer w0.25: J3.2 8.256,63.746 23.504,63.746 24.989,62.262 28.238,62.262 v1(29.3,61.2)
SPI2_MOSI: J3.1 U1.36 | length 31.9
  Top Layer w0.25: U1.36 26.878,59.878 v1(29.2,62.2)
  Bottom Layer w0.25: J3.1 6.42,64.45 23.669,64.45 25.319,62.8 26.83,62.8 28.6,62.8 v1(29.2,62.2)
SPI2_NSS: J3.4 U1.33 | length 21.5
  Top Layer w0.25: U1.33 28.378,58.472 29.312,59.405 29.312,59.962 v1(29.35,60)
  Bottom Layer w0.25: J3.4 12.188,62.5 12.838,63.15 23.1,63.15 24.5,61.75 27.6,61.75 v1(29.35,60)
SPI2_SCK: J3.3 U1.34 | length 22.5
  Top Layer w0.25: U1.34 27.878,59.296 28.194,59.612 28.512,59.612 v1(28.55,59.65)
  Bottom Layer w0.25: J3.3 10.853,61.197 27.003,61.197 v1(28.55,59.65)
SWCLK-JTCK: J1.2 U1.49 | length 33.5
  Top Layer w0.25: J1.2 8.87,37.85 17.65,37.85 21.234,41.434 21.955,41.434 v1(21.959,41.438) ; U1.49 18.638,55.512 19.554,55.512 20.7,54.366 v1(20.7,47.3)
  Bottom Layer w0.25: v1(20.7,47.3) 21.959,46.041 v1(21.959,41.438)
SWDIO-JTMS: J1.1 U1.46 | length 52.9
  Top Layer w0.25: J1.1 3,37.08 3,63.9 3.6,64.5 19.089,64.5 21.878,61.71 U1.46
USART1_RX: U1.24 U2.5 | length 36.6
  Top Layer w0.25: U2.5 21.258,23.863 22.571,22.55 24.619,22.55 25.2,23.131 25.2,28.7 29.5,33 29.5,51.194 29.818,51.512 30.619,51.512 U1.24
USART1_TX: U1.25 U2.6 | length 35.4
  Top Layer w0.25: U2.6 22.592,24.608 22.592,23.508 23.05,23.05 24.25,23.05 24.7,23.5 24.7,28.8 29.05,33.15 29.05,51.65 29.422,52.022 U1.25
VDD_CAP_filter_1: C1.1 C3.1 C4.1 C7.1 C8.1 C9.1 C10.1 C15.1 J2.1 R8.1 R13.1 U1.1 U1.13 U1.19 U1.32 U1.48 U1.64 U4.3 | length 110.4
  Top Layer w0.25: C10.1 17.022,48.022 U1.64 v1(19.644,48.022) ; C1.1 20.6,44.1 20.878,44.378 U1.1 20.878,46.485 20.953,46.56 20.953,46.648 21.803,47.497 ; C9.1@20.9,59.4 20.878,59.378 U1.48 20.888,57.762 20.888,56.755 24.972,52.671 26.906,52.671 29.747,55.512 30.619,55.512 U1.32 ; v1(21.3,48) 21.803,47.497 ; v1(23.871,49.171) 23.477,49.171 21.803,47.497 ; v1(25.95,49.2) 25.978,49.172 26.878,49.172 28.322,49.172 v1(28.35,49.2) ; U1.19 32.478,49.022 32.575,48.925 C7.1 ; U1.32@30.651,55.512 31.373,55.512 31.38,55.505 32.25,55.505 32.3,55.455 C8.1@32.3,55.2 ; C7.1@32.4,49.022 32.547,49.022 32.6,49.075 v1(32.6,49.6)
  Top Layer w0.35: C3.1@26.878,44.022 U1.13 26.878,49.172 ; 26.906,49.172 26.906,52.671
  Top Layer w0.4: R8.1 6.6,23.4 9.05,20.95 v1(10.6,20.95) ; v1(13.95,17.6) 15.85,15.7 C15.1 21.589,15.689 21.589,13.982 21.478,13.872 R13.1 ; C15.1@21.6,15.8 22.5,16.7 22.5,19.4 25.9,22.8 v1(25.9,28.6) ; J2.1 25.88,34.78 25.9,34.8 ; v1(25.9,31.1) 25.9,34.8 ; C3.1@26.878,44 26.878,43.878 25.9,42.9 25.9,34.8 ; C3.1 26.901,43.999 C4.1 C4.1
  Bottom Layer w0.25: v1(19.644,48.022) 19.655,48.011 21.289,48.011 v1(21.3,48) ; v1(23.871,49.171) 23.885,49.186 25.936,49.186 v1(25.95,49.2) ; v1(28.35,49.2) 32.151,49.2 32.551,49.6 v1(32.6,49.6)
  Bottom Layer w0.4: v1(10.6,20.95) v1(13.95,17.6) ; v1(25.9,28.6) v1(25.9,31.1)
"VUSB (5V)": C6.1 C11.1 C14.2 C16.1 C19.1 C22.1 C25.1 J5.1 R12.2 U2.1 U3.8 U4.1 U4.5 U5.8 U6.8 U7.8 U8.8 | length 121.2
  Top Layer w0.4: J5.1 11.5,16.1 ; C6.1 14.859,24 14.9,23.959 16.087,23.959 16.178,24.05 U2.1 ; U2.1@16.178,24.015 16.178,21.8 ; R12.2 16.25,21.872 16.178,21.8 ; v1(27.1,29.05) 27.1,29.036 26.6,28.536 26.6,18.9 23.489,15.789 23.489,14.282 U4.1 23.378,14.172 23.378,13.022 22.528,12.172 U4.5 22.428,10.772 22.428,10.028 21.8,9.4 18.2,9.4 11.5,16.1 ; C25.1@33.833,49.233 35.808,49.233 35.89,49.151 35.89,48.114 v1(35.9,48.104) ; v1(38.8,29) 38.803,29.003 U5.8 ; v1(40,32.05) 40.6,32.05 41.094,31.556 41.094,30.744 C16.1 ; v1(40,40.1) 40,40.8 40.303,41.103 U6.8 41.119,41.151 41.119,42.581 C19.1@41.181,42.581 ; C16.1@41,30.6 41.119,30.481 41.119,29.051 U5.8 ; v1(41.1,19.75) C11.1 41.148,17.453 41.148,15.823 U3.8 ; v1(41.1,27.9) 41.119,27.919 41.119,28.956 U5.8 ; C19.1@41.181,42.631 41.3,42.75 42.3,42.75 v1(42.6,43.05) ; v1(43.9,49.6) 44.2,49.3 ; v1(44.2,47.4) 44.2,49.3 ; C22.1 44.25,49.25 44.2,49.3 ; C22.1@46,49.247 47.377,49.247 U7.8 ; 11.5,16.1 16.178,20.778 16.178,21.8
  Bottom Layer w0.4: v1(27.1,29.05) 38.736,29.05 38.786,29 v1(38.8,29) ; v1(35.9,48.104) 35.904,48.1 42.4,48.1 v1(43.9,49.6) ; v1@40,32 v1(40,40.1) ; v1(41.1,19.75) v1(41.1,27.9) ; v1@42.6,43 44.2,44.6 v1(44.2,47.4)
pads on no net: J5.4 U1.5 U1.6 U1.11 U1.21 U1.22 U1.23 U1.26 U1.27 U1.28 U1.29 U1.30 U1.41 U1.42 U1.43 U1.54 U1.57 U1.61 U1.62 U2.2 U2.3 U2.7 U2.8 U4.6

## Polygon pours and split planes (outlines as drawn)
GND on Top Layer "gndt" (solid, remove dead copper, pour order 7): 58.625,5.6 58.625,67.7 2.025,67.7 2.025,5.6
Motor1_Power on Top Layer "mp" (solid, remove dead copper, pour order 1): 43.3,14 49.9,14 50.3,14.4 54.8,14.4 54.8,10.3 48.3,10.3 45.5,7.5 43.3,7.5
Motor2_Power on Top Layer "mp" (solid, remove dead copper, pour order 2): 43.3,27.1 49.9,27.1 50.3,27.5 54.8,27.5 54.8,23.4 48.3,23.4 45.5,20.6 43.3,20.6
Motor3_Power on Top Layer "mp" (solid, remove dead copper, pour order 3): 43.4,39.479 50.031,39.479 50.431,39.879 54.8,39.879 54.8,35.779 48.431,35.779 45.631,32.979 43.4,32.979
12V on Top Layer "GND" (solid, remove dead copper, pour order 0): 42.8,14.102 42.8,7.5 38,7.5 32.4,13.1 32.4,43.8 36.7,48.1 36.7,50.9 43.5,50.9 43.5,46.7 48.7,46.7 48.7,50.9 55.4,50.9 55.4,48.2 51.877,43.6 39,43.6 38.4,43 38.4,39.6 42.8,39.6 42.8,33 38.4,33 38.4,27.4 42.7,27.4 42.7,19.2 38.3,19.2 38.3,14.102
Motor4_Power on Top Layer "mp" (solid, remove dead copper, pour order 5): 50,58.45 49.85,58.45 48.7,57.3 48.7,51.5 55.4,51.5 55.4,55.8 54.1,57.1 54.1,63.6 50,63.6
Motor5_Power on Top Layer "mp" (solid, remove dead copper, pour order 4): 36.6,51.5 36.6,63.6 40.7,63.6 40.7,57.3 43.5,54.5 43.5,51.5
GND on Bottom Layer "gndb" (solid, remove dead copper, pour order 6): 58.904,5.399 58.804,5.499 58.804,67.599 2.104,67.599 2.004,67.699 2.004,5.599

## Silkscreen, mask and mechanical layers (free items; w line width, h text height)
Top Overlay:
  text "M5" at 37.8,66 h0.8
  text "M4" at 51.4,65.8 h0.8
  text "SO" at 6,63.95 h1
  text "SCK" at 8.5,63.95 h1
  text "NSS" at 11.85,63.95 h1
  text "SI" at 3.75,63.9 h1
  text "GND" at 4.55,59 h1
  text "TX" at 8.6,59 h1
  text "RX" at 11.25,59 h1
  text "12V" at 39,55.5 h1 r90
  text "PWM" at 42.4,55.5 h1 r90
  text "GND" at 35.6,55.45 h1 r90
  text "GND" at 48.9,54.9 h1 r90
  text "12V" at 52.7,54.9 h1 r90
  text "PWM" at 56.1,54.9 h1 r90
  text "M5" at 3.45,54.5 h1
  text "M4" at 6.15,54.5 h1
  text "M3" at 8.65,54.5 h1
  text "M2" at 11.25,54.5 h1
  text "M1" at 13.85,54.5 h1
  text "GND" at 46.5,41.1 h1
  text "M3" at 58.05,37.55 h0.8 r90
  text "12V" at 46.5,37.3 h1
  text "GND" at 19.7,36.9 h1
  text "SWO" at 11.65,34.35 h1 r270
  text "DIO" at 3.8,34.3 h1 r270
  text "CLK" at 6.4,34.3 h1 r270
  text "JDI" at 8.9,34.3 h1 r270
  text "RST" at 14.1,34.3 h1 r270
  text "VDD" at 19.75,34.3 h1
  text "PWM" at 46.5,33.9 h1
  text "GND" at 46.5,28.7 h1
  text "M2" at 58.1,25 h0.8 r90
  text "12V" at 46.5,24.9 h1
  text "PWM" at 46.5,21.5 h1
  text "12V" at 34,16.3 h1.2
  text "GND" at 28.5,16.25 h1.2
  text "GND" at 46.5,15.4 h1
  text "M1" at 58.1,12.6 h0.8 r90
  text "12V" at 46.5,11.6 h1
  text "PWM" at 46.5,8.3 h1
Mechanical 1:
  the board outline again, w0.5

## Text inside footprints (layer, text, board x,y; h text height)
J5: Mechanical 13 "PCB Edge" at 1.3,16.7 h0.5 r270